# Allegro board C074P02-IPCAM-M1-A02.brd
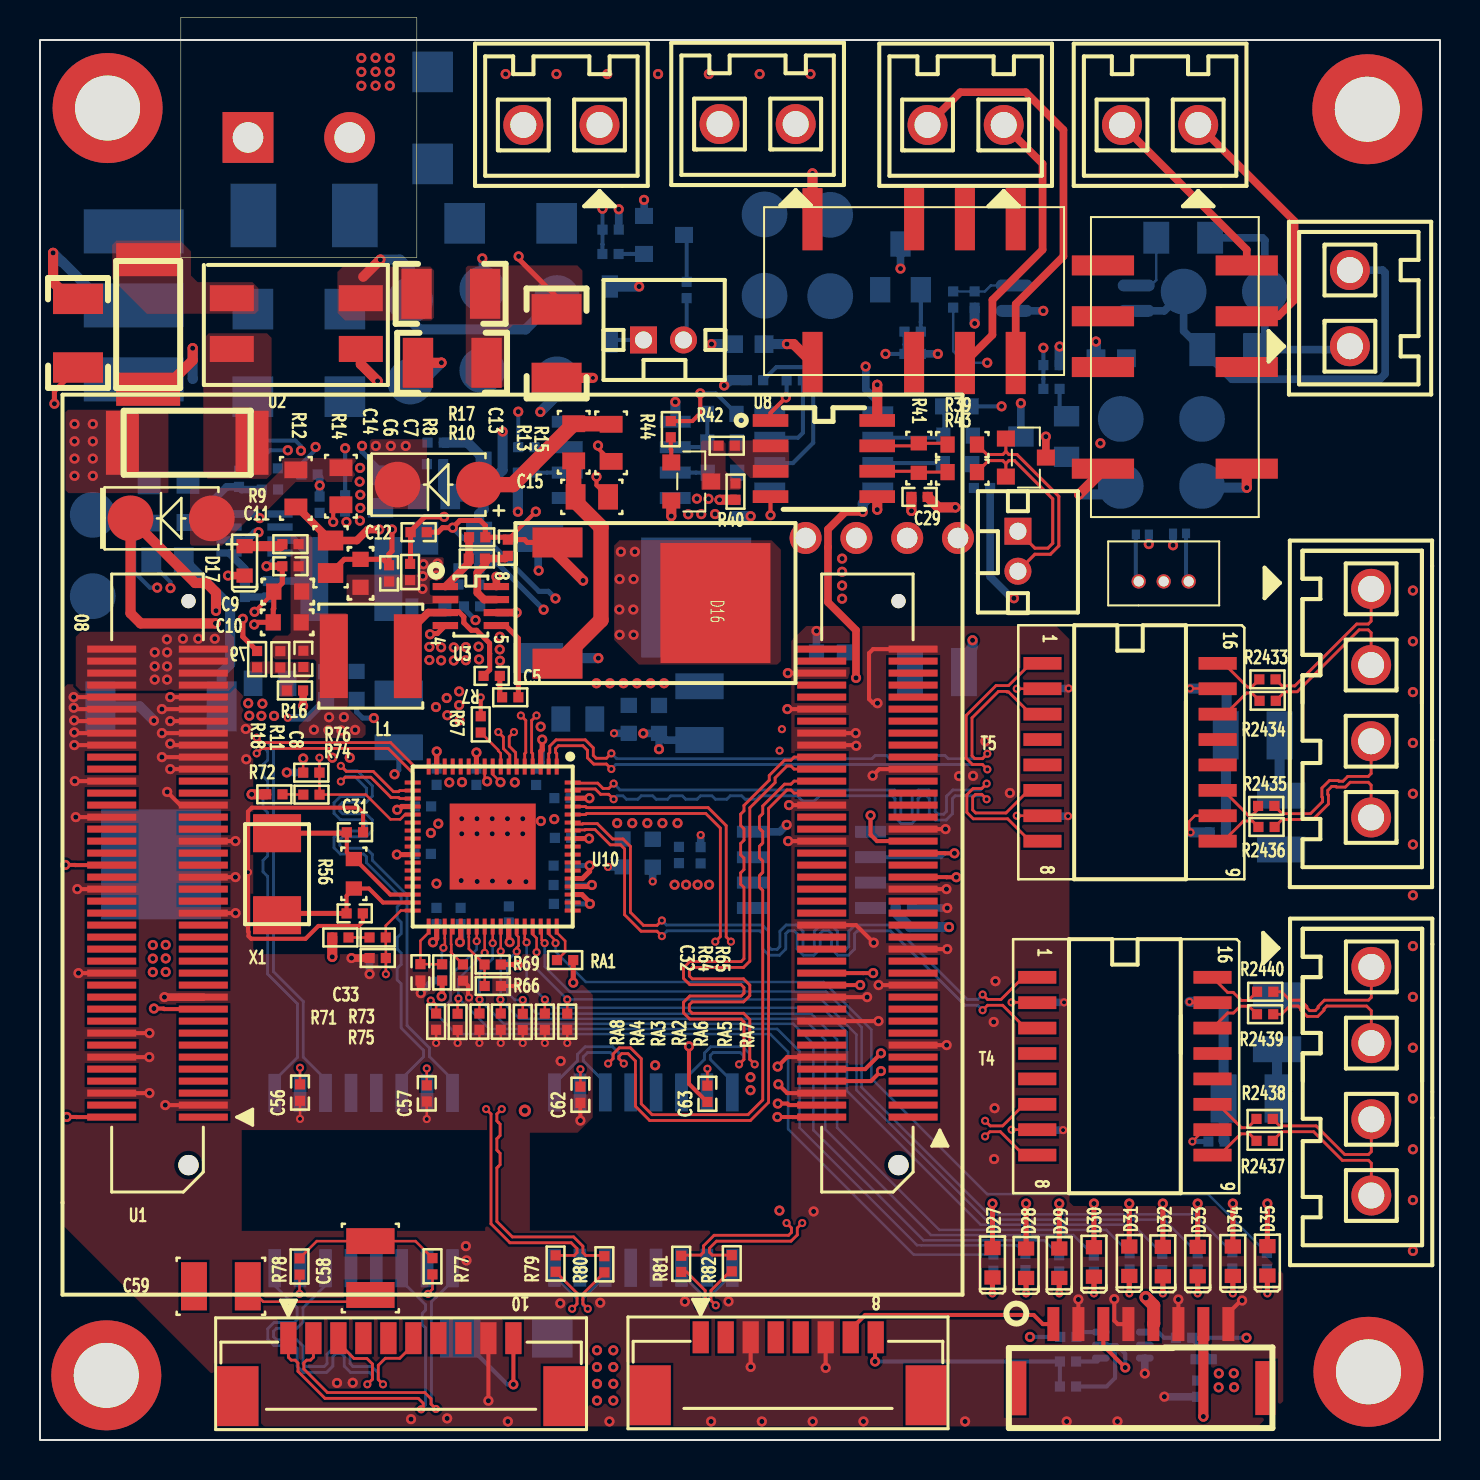
[diagram p0: board, top side]
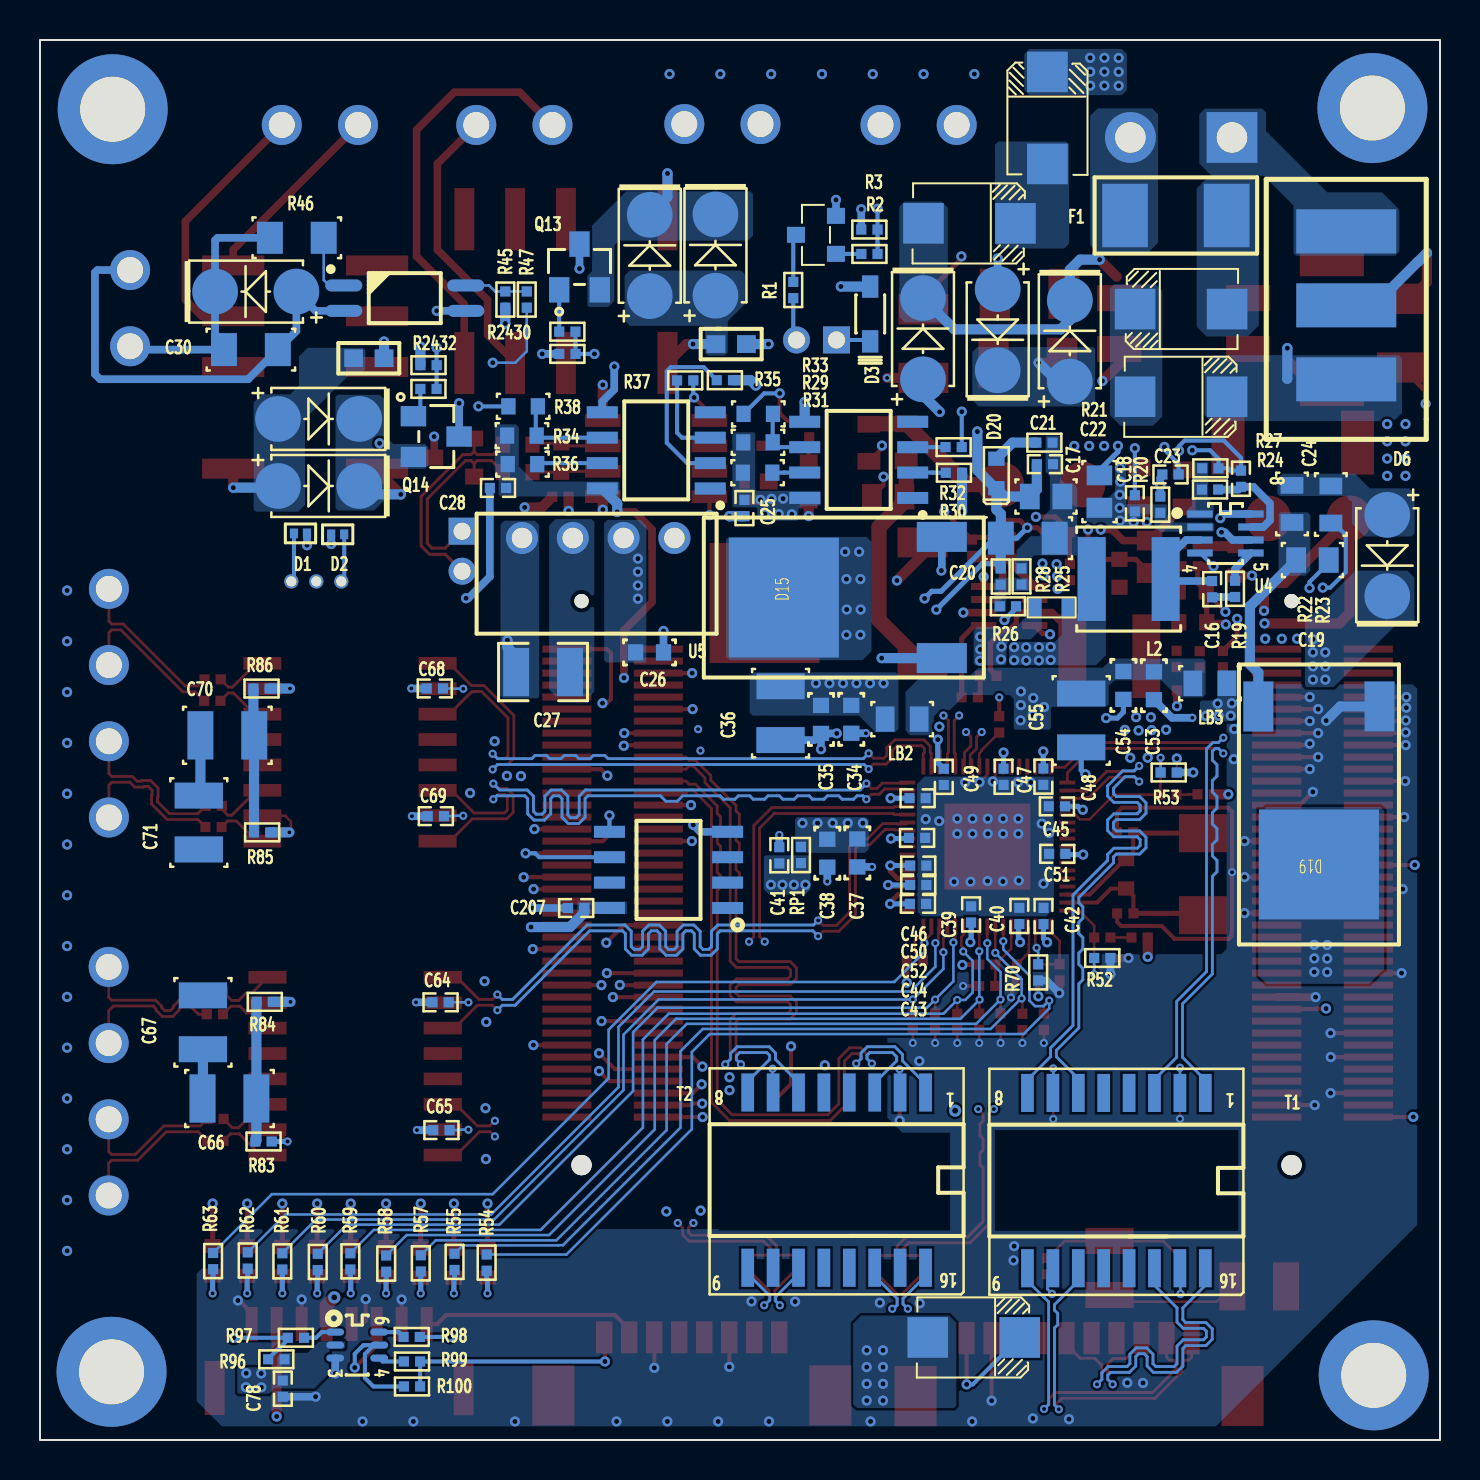
[diagram p1: board, bottom side, seen from below]

Outline 70 x 70 mm; copper layers: TOP, G1, S1, P1, G2, BOTTOM. Coordinates in mm from the lower left corner of the outline.
Outline path: rectangle 0,0 70,70

## Design rules (mm)
net group 16D_AL_OUT: nets 16D_AL_OUT AC_OUTL
net group 485_A: nets 485_A N17404012
net group 485_B: nets 485_B N17404016
net group AU_C: nets AU_C LSADC_CH1
net group PRX+1: nets PRX1P PRX+1
net group PRX+2: nets PRX2P PRX+2
net group PRX-1: nets PRX1N PRX-1
net group PRX-2: nets PRX2N PRX-2
net group PTX+1: nets PTX1P PTX+1
net group PTX+2: nets PTX2P PTX+2
net group PTX-1: nets PTX1N PTX-1
net group PTX-2: nets PTX2N PTX-2
net group PTX-6: nets PTX-6 SD6
net group PTX-7: nets PTX-7 SD7
net group RX3N: nets RX3N RXIM3
net group RX3P: nets RX3P RXIP3
net group TX3N: nets TX3N TXOM3
net group TX3P: nets TX3P TXOP3
net group CRTX1: nets RXIM1 RXIP1 TXOM1 TXOP1
net group CRTX2: nets RXIM2 RXIP2 TXOM2 TXOP2
net group CRTX3: nets MDI0+ MDI0- MDI1+ MDI1-
net group CRTX5: nets RXIM5 RXIP5 TXOM5 TXOP5
net group N17440667: nets N17440661
net group N17440679: nets N17440691
net group N17440699: nets N17440673 N17440699 N17440701
net group RTX5: nets PRX+5 PRX-5 PTX+5 PTX-5

## Placement (name value [footprint] x y rotation side)
C1  1NF/2KV  [1210]  18.83 57.31 0 top
C2  1NF/2KV  [1210]  1.9 57.06 270 top
C3  1NF/2KV  [1210]  18.9 53.86 0 top
C4  1NF/2KV  [1210]  25.83 56.53 270 top
C5  100NF  [SC0402]  22.58 38.2 180 top
C6  22uf_16V  [SC0603]  16.03 43.33 90 top
C7  100NF  [SC0402]  17.45 43.33 90 top
C8  15PF  [SC0402]  13.17 39.06 270 top
C9  22uf_16V  [SC0603]  12.39 42.42 180 top
C10  22uf_16V  [SC0603]  12.36 40.88 180 top
C11  100NF  [SC0402]  12.52 43.69 180 top
C12  100NF/NC  [SC0402]  18.93 45.39 0 top
C13  100NF  [SC0402]  23.39 44.61 90 top
C14  100NF  [SC0805]  14.53 44.16 270 top
C15  100NF  [SC0805]  27.59 47.16 0 top
C16  100NF  [SC0402]  11.39 42.54 90 bottom
C17  22UF  [SC0805]  17.03 47.42 90 bottom
C18  100NF  [SC0402]  15.26 46.83 90 bottom
C19  100NF  [SC0805]  6.38 44 180 bottom
C20  47UF  [SC1206]  20.61 45.09 0 bottom
C21  22UF  [SC0805]  19.7 47.17 0 bottom
C22  100NF  [SC0402]  19.75 48.79 0 bottom
C23  100NF/NC  [SC0402]  13.47 48.28 180 bottom
C24  100NF  [SC0402]  9.95 48.06 90 bottom
C25  100nF  [SC0402]  34.78 46.6 270 bottom
C26  100NF  [SC0603]  39.52 39.38 180 bottom
C27  22UF/50V  [SC1210B]  44.85 38.4 180 bottom
C28  100nF  [SC0402]  47.1 47.6 0 bottom
C29  100NF  [SC0402]  43.98 47.16 180 top
C30  1NF/2KV  [SC1206]  59.46 54.52 180 bottom
C31  30PF  [SC0402]  15.75 30.39 180 top
C32  100NF  [SC0402]  19.02 23.38 90 top
C33  30PF  [SC0402]  15.73 26.33 180 top
C34  100NF  [SC0603]  29.44 36.03 270 bottom
C35  22uF  [SC0603]  30.95 36.03 270 bottom
C36  47UF  [SC1210]  32.97 36.34 270 bottom
C37  100NF  [SC0603]  29.13 29.35 270 bottom
C38  10UF/NC  [SC0603]  30.64 29.34 270 bottom
C39  100NF  [SC0402]  23.45 26.28 90 bottom
C40  100NF  [SC0402]  21.03 26.2 90 bottom
C41  100NF  [SC0402]  33.03 29.24 90 bottom
C42  100NF  [SC0402]  19.83 26.2 90 bottom
C43  100NF  [SC0402]  26.1 26.81 180 bottom
C44  100NF  [SC0402]  26.09 27.75 180 bottom
C45  100NF  [SC0402]  19.15 31.68 0 bottom
C46  100NF  [SC0402]  26.12 32.09 180 bottom
C47  100NF  [SC0402]  21.82 33.16 270 bottom
C48  100NF  [SC0402]  19.83 33.17 270 bottom
C49  100NF  [SC0402]  24.81 33.16 270 bottom
C50  100NF  [SC0402]  26.15 30.1 180 bottom
C51  100NF  [SC0402]  19.14 29.31 0 bottom
C52  100NF  [SC0402]  26.09 28.72 180 bottom
C53  100NF  [SC0603]  14.3 37.72 270 bottom
C54  22uF  [SC0603]  15.83 37.73 270 bottom
C55  47UF  [SC1210]  17.94 35.98 270 bottom
C56  100nF  [SC0402]  13 17.37 90 top
C57  100nF  [SC0402]  19.34 17.33 90 top
C58  1NF/2KV  [SC1210]  16.52 8.6 90 top
C59  1NF/2KV  [SC1210]  9.04 7.68 0 top
C62  100nF  [SC0402]  27.02 17.26 90 top
C63  100nF  [SC0402]  33.37 17.31 90 top
C64  100nF  [SC0402]  49.97 21.88 180 bottom
C65  100nF  [SC0402]  49.93 15.49 180 bottom
C66  1NF/2KV  [SC1210]  60.53 17.07 180 bottom
C67  1NF/2KV  [SC1210]  61.85 20.88 270 bottom
C68  100nF  [SC0402]  50.26 37.58 180 bottom
C69  100nF  [SC0402]  50.21 31.19 180 bottom
C70  1NF/2KV  [SC1210]  60.63 35.23 180 bottom
C71  1NF/2KV  [SC1210]  62.06 30.87 90 bottom
C78  10NF/25V  [SC0402]  57.86 2.57 90 bottom
C207  100NF  [SC0402]  43.19 26.6 180 bottom
D1  PESD5V0S1BL315  [HSOD882]  56.98 45.33 180 bottom
D2  PESD5V0S1BL315  [HSOD882]  55.12 45.28 0 bottom
D3  BAT60BE6327  [HSOD323A]  28.49 56.3 270 bottom
D4  SS36-A  [SMB]  12.94 56.55 0 bottom
D5  SS36-A  [SMB]  12.94 52.16 180 bottom
D6  -  [B3D090L]  4.69 53.03 90 bottom
D7  SMAJ5_0CA  [SMA]  18.51 54.95 90 bottom
D9  SMAJ5_0CA  [SMA]  25.85 55.06 90 bottom
D10  SMAJ5_0CA  [SMA]  22.11 55.52 270 bottom
D13  BZT52C5V1  [SMA]  6.56 46.08 180 top
D14  BZT52C5V1  [SMA]  19.91 47.77 180 top
D15  BT151S-500R  [D-PACK7_7]  32.81 42.12 90 bottom
D16  BT151S-500R  [D-PACK7_7]  33.77 41.85 270 top
D17  Led-G-0603  [LED0603]  10.23 43.96 90 top
D18  BZT52C3V3  [SMA]  2.64 44.22 270 bottom
D19  BT151S-500R  [D-PACK7_7]  6.05 28.78 0 bottom
D20  Led-G-0603  [LED0603]  22.18 48.33 90 bottom
D21  psot12c  [SOT23]  49.29 49.12 270 top
D22  SMAJ36CA  [SMA]  59.21 57.42 0 bottom
D27  LED  [LED0603]  47.62 8.86 90 top
D28  LED  [LED0603]  49.3 8.84 90 top
D29  LED  [LED0603]  50.96 8.84 90 top
D30  LED  [LED0603]  52.7 8.9 90 top
D31  LED  [LED0603]  54.46 8.94 90 top
D32  LED  [LED0603]  56.14 8.92 90 top
D33  LED  [LED0603]  57.88 8.92 90 top
D34  LED  [LED0603]  59.64 8.94 90 top
D35  LED  [LED0603]  61.37 8.96 90 top
D36  SS36  [SMB]  23.31 5.13 180 bottom
D50  S1G  [SMA]  39.51 59.23 90 bottom
D51  S1G  [SMA]  56.07 47.7 180 bottom
D70  S1G  [SMA]  36.23 59.25 90 bottom
D71  S1G  [SMA]  56.07 51.05 180 bottom
D72  SS36-A  [SMB]  23.53 60.83 180 bottom
D73  SS36-A  [SMB]  19.63 66.1 90 bottom
F1  PTC FC-1.5A  [SF6127]  13.21 61.23 180 bottom
J1  ZH-3P  [CON1X3PD1_25]  54.93 42.93 0 top
J2  PH-2P  [CON1X2PD2]  30.18 55 0 top
J3  KF127-2P  [CON1X2PD3_811]  35.88 65.8 180 top
J4  POW_IN  [CON-1X2P-508-KF127S]  12.94 65.13 0 top
J5  KF127-2P  [CON1X2PD3_811]  26.07 65.75 180 top
J6  PH-2P  [CON1X2PD2]  48.9 45.44 270 top
J7  IO_OUT3  [CON1X2PD3_811]  65.49 56.59 90 top
J8  IO_OUT3  [CON1X2PD3_811]  46.28 65.75 180 top
J9  IO_OUT3  [CON1X2PD3_811]  56 65.75 180 top
J10  Audio  [A1251WV-S-8P]  38.03 5.14 180 top
J11  SIP-10  [A1251WV-S-10P]  17.42 5.09 180 top
J12  CON4  [CON1X4PD3_81-180]  66.57 21.75 270 top
J13  CON4  [CON1X4PD3_81-180]  66.56 40.65 270 top
J18  HEADER 8  [GH1_25_8P]  55.04 2.6 0 top
L1  4.7UH  [SPL0505L]  16.54 39.19 180 top
L2  4.7UH  [SPL0505L]  15.57 43.05 0 bottom
LB1  120R-100MHz  [L0603]  19.42 41.63 0 bottom
LB2  MGLB2012_220T_LF  [SL0805]  26.89 36.04 0 bottom
LB3  MGLB2012_220T_LF  [SL0805]  11.5 37.83 0 bottom
LB187  BLM18PG121SN1D  [SL0603]  35.44 54.8 180 bottom
LB188  BLM18PG121SN1D  [SL0603]  53.56 54.09 180 bottom
M1  NC  [HOLE6C3_5MM]  3.38 66.6 0 top
M2  NC  [HOLE6C3_5MM]  66.37 66.54 0 top
M3  NC  [HOLE6C3_5MM]  66.42 3.41 0 top
M4  NC  [HOLE6C3_5MM]  3.31 3.23 0 top
Q1  BC847ALT1/NPN  [SOT23]  31.2 60.26 90 bottom
Q2  BC847ALT1/NPN  [SOT23]  32.56 47.93 270 top
Q13  8550  [SOT23-Z]  43.03 58.65 180 bottom
Q14  8550  [SOT23-Z]  50.19 50.17 270 bottom
R1  499R  [SR0402]  32.34 57.5 270 bottom
R2  1K 1%  [SR0402]  28.53 59.3 180 bottom
R3  10K  [SR0402]  28.53 60.52 180 bottom
R4  0R  [SR2512]  5.41 55.77 90 top
R6  0R  [SR2512]  7.36 49.86 0 top
R7  10R  [SR0402]  23.51 37.14 180 top
R8  100K  [SR0402]  18.51 43.4 90 top
R9  2K  [SR0402]  12.52 44.79 180 top
R10  100K  [SR0402]  21.84 44.07 180 top
R11  40.2K  [SR0402]  12.02 39.03 270 top
R12  100R  [SR0805]  12.79 47.58 270 top
R13  100R  [SR0805]  26.69 49.89 270 top
R14  39R  [SR0805]  15.05 47.69 90 top
R15  39R  [SR0805]  28.56 49.86 90 top
R16  33.2K  [SR0402]  12.75 37.48 180 top
R17  12.7K  [SR0402]  21.86 45.14 0 top
R18  7.68K  [SR0402]  10.85 39.04 90 top
R19  10R  [SR0402]  10.25 42.56 270 bottom
R20  100K  [SR0402]  13.98 46.77 90 bottom
R21  1K  [SR0402]  19.78 49.87 0 bottom
R22  100R  [SR0805]  7.4 46.8 270 bottom
R23  100R  [SR0805]  5.46 46.77 90 bottom
R24  100K  [SR0402]  11.5 47.52 0 bottom
R25  40.2K  [SR0402]  20.92 43.18 270 bottom
R26  33K  [SR0402]  21.6 41.68 0 bottom
R27  10K  [SR0402]  11.48 48.58 180 bottom
R28  13K  [SR0402]  21.96 43.17 90 bottom
R29  10K  [SR0603]  34.1 49.88 180 bottom
R30  510R  [SR0402]  24.3 48.36 0 bottom
R31  10K  [SR0603]  34.12 48.37 180 bottom
R32  0R  [SR0402]  24.32 49.64 0 bottom
R33  0R  [SR0603]  34.09 51.31 0 bottom
R34  10K  [SR0603]  45.9 50.22 180 bottom
R35  510R  [SR0402]  35.76 52.99 0 bottom
R36  10K  [SR0603]  45.88 48.79 180 bottom
R37  0R  [SR0402]  37.74 52.98 0 bottom
R38  0R  [SR0603]  45.84 51.68 0 bottom
R39  10R  [SR0603]  46.11 49.77 0 top
R40  10K  [SR0402]  34.77 47.42 270 top
R41  120R/NC  [SR0603]  43.94 49.1 90 top
R42  0R  [SR0402]  34.34 49.71 0 top
R43  10R  [SR0603]  46.11 48.39 0 top
R44  1K 1%  [SR0402]  31.54 50.54 270 top
R45  10K 1%  [SR0402]  46.73 57.02 90 bottom
R46  1K/1206  [SR1206]  57.16 60.11 180 bottom
R47  0K 1%  [SR0402]  45.66 57.02 270 bottom
R52  0R/NC  [SR0402]  16.89 24.1 180 bottom
R53  0R/NC  [SR0402]  13.57 33.38 180 bottom
R54  75R  [SR0402]  47.67 8.87 270 bottom
R55  75R  [SR0402]  49.27 8.91 270 bottom
R56  1M  [SR0603]  15.69 28.31 270 top
R57  75R  [SR0402]  50.96 8.83 270 bottom
R58  75R  [SR0402]  52.69 8.82 270 bottom
R59  75R  [SR0402]  54.48 8.93 270 bottom
R60  75R  [SR0402]  56.11 8.9 270 bottom
R61  75R  [SR0402]  57.88 8.93 270 bottom
R62  75R  [SR0402]  59.61 8.98 270 bottom
R63  75R  [SR0402]  61.34 8.95 270 bottom
R64  470K  [SR0402]  20.11 23.38 90 top
R65  0R  [SR0402]  21.15 23.37 90 top
R66  NC/4.7K  [SR0402]  22.64 22.7 0 top
R67  6.2K  [SR0402]  22.04 35.78 90 top
R69  4.7K/NC  [SR0402]  22.63 23.77 0 top
R70  4.7K/NC  [SR0402]  20.09 23.38 270 bottom
R71  1K  [SR0402]  15.02 25.12 0 top
R72  1K  [SR0402]  11.72 32.28 0 top
R73  100R  [SR0402]  16.88 25.12 0 top
R74  100R  [SR0402]  13.57 32.27 0 top
R75  910R  [SR0402]  16.89 24.1 180 top
R76  910R  [SR0402]  13.57 33.37 180 top
R77  75R  [SR0402]  19.62 8.69 90 top
R78  75R  [SR0402]  12.98 8.68 90 top
R79  0R  [SR0402]  25.78 8.82 270 top
R80  0R  [SR0402]  28.22 8.78 270 top
R81  0R  [SR0402]  32.06 8.81 270 top
R82  0R  [SR0402]  34.59 8.84 270 top
R83  75R  [SR0402]  58.82 14.92 0 bottom
R84  75R  [SR0402]  58.76 21.91 0 bottom
R85  75R  [SR0402]  58.89 30.38 0 bottom
R86  75R  [SR0402]  58.92 37.57 0 bottom
R96  1K  [SR0402]  58.18 4.04 180 bottom
R97  0R  [SR0402]  57.2 5.11 0 bottom
R98  0R  [SR0402]  51.41 5.15 0 bottom
R99  0R  [SR0402]  51.4 3.93 0 bottom
R100  0R/NC  [SR0402]  51.4 2.68 0 bottom
R2429  1K  [R0402]  43.63 55.42 0 bottom
R2430  1K  [SR0402]  43.63 54.3 180 bottom
R2431  1K  [R0402]  50.58 52.55 0 bottom
R2432  1K  [SR0402]  50.57 53.74 180 bottom
R2433  2.2R  [SR0402]  61.37 38.03 0 top
R2434  2.2R  [SR0402]  61.38 36.96 0 top
R2435  2.2R  [SR0402]  61.31 31.71 0 top
R2436  2.2R  [SR0402]  61.33 30.65 0 top
R2437  2.2R  [SR0402]  61.23 14.96 0 top
R2438  2.2R  [SR0402]  61.23 16.05 0 top
R2439  2.2R  [SR0402]  61.25 21.29 0 top
R2440  2.2R  [SR0402]  61.26 22.41 0 top
RA1  NC(4.7K)  [SR0402]  26.26 24 0 top
RA2  NC(4.7K)  [SR0402]  23.04 20.92 270 top
RA3  NC(4.7K)  [SR0402]  21.97 20.92 270 top
RA4  NC(4.7K)  [SR0402]  20.88 20.9 270 top
RA5  NC(4.7K)  [SR0402]  25.24 20.92 270 top
RA6  NC(4.7K)  [SR0402]  24.14 20.9 270 top
RA7  NC(4.7K)  [SR0402]  26.36 20.92 270 top
RA8  NC(4.7K)  [SR0402]  19.81 20.92 270 top
RLY3  HFD3/3-S  [HFD3_3-S]  43.7 57.44 0 top
RLY4  HFD3/3-S  [HFD3_3-S]  56.74 53.65 90 top
RP1  0R  [SR0402]  31.95 29.25 90 bottom
T1  H1102L  [STFM16-50-285]  16.18 12.97 0 bottom
T2  H1102L-ai  [STFM16-50-285]  30.17 12.99 0 bottom
T4  H1102L  [STFM16-50-285]  54.25 18.69 270 top
T5  H1102L  [STFM16-50-285]  54.5 34.39 270 top
U1  3516DV300-MD  [16DV300_CORE1]  1.12 7.27 0 top
U2  SF0905100YL  [SF0905250YL-1]  9.59 54.55 0 top
U3  MP1495S  [TSOT23-8]  21.54 41.7 270 top
U4  MP1495S  [TSOT23-8]  10.73 45.33 270 bottom
U5  -  [B0505S-W2R2]  38.28 45.1 0 bottom
U6  HCPL0600  [SOP8]  29.07 49.01 0 bottom
U7  HCPL0600  [SOP8]  39.19 49.48 0 bottom
U8  MAX485ESA  [SOP8-50-150]  39.19 49.07 270 top
U9  TLP281-GB  [SOP4]  51.76 57.09 180 bottom
U10  IP178G  [QFN68-178]  22.64 29.67 270 top
U14  SG3001  [SC70-6]  54.14 4.75 270 bottom
U28  AT88SC0104  [SO8]  38.32 28.5 0 bottom
X1  NX5032GB-25.000M-STD-CSK-5  [5032]  11.85 28.29 0 top

## Library data of the parts
C1-C4 = C_3: room: 2
C5-C13 = C_0: room: 2
C14 C15 C19 = C_4: room: 2
C16 C18 C22-C24 = C: signal model: DEFAULT_CAPACITOR_100000pF_1_2; room: 2
C17 C21 = C: signal model: DEFAULT_CAPACITOR_2.2e+07pF_1_2; room: 2
C20 = C: signal model: DEFAULT_CAPACITOR_4.7e+07pF_1_2; room: 2
C25 C28 C30 = CAP_NP: room: 3
C26 C27 = C_0: room: 3
C29 = C: room: 3
C31-C55 = C-0603: room: 4
C56-C59 = CAP_NP: room: 4
C62-C71 = CAP_NP: room: 5
C78 = CAP_NP: room: 6
C207 = C_3: room: 1
D1 D2 = DZ_L: room: 1
D3 = D_A_0: room: 1
D4 D5 D72 D73 = D_A_0: room: 2
D6 = CON3: room: 2
D7 D9 D10 = DZ3_0: room: 2
D13 D14 D18 = BZX84C10/SOT_0: room: 2
D15 D16 D19 = BZX84C10/SOT_2
D17 D20 = LED_1: room: 2
D21 = D-TVS_0: room: 3
D22 = BZX84C10/SOT_0: room: 3
D27-D34 = LL4148_1: room: 4
D35 = LL4148_2: room: 4
D36 = BZX84C10/SOT_0: room: 4
D50 D51 D70 D71 = DIODE_3: room: 3
F1 = FS-A: room: 2
J1 = HEADER 3: room: 1
J2 = CON2: room: 1
J3-J5 = CON2: room: 2
J6-J9 = CON2: room: 3
J10 = 8 HEADER: room: 4
J11 = SIP-10: room: 4
J12 J13 = CON4: room: 5
J18 = HEADER 8: room: 6
L1 L2 = L: signal model: DEFAULT_INDUCTOR_4.7e-06nH_1_2; room: 2
LB1 = BEAD: room: 2
LB2 LB3 = LB: room: 4
LB187 LB188 = LB: room: 3
M1-M4 = ID-BOARD_1: room: 1
Q1 = NPN-BEC_2: room: 1
Q2 = BPW37/TO_0: room: 3
Q13 Q14 = PNP BEC: room: 3
R1-R3 = Resistor: room: 1
R4 R6 = R: room: 2
R7 R8 R10 R11 R16-R18 = R_2: room: 2
R9 R12-R15 R21-R23 = R-0603: room: 2
R19 = R: signal model: DEFAULT_RESISTOR_10.000000OHM_1_2; room: 2
R20 R24 = R: signal model: DEFAULT_RESISTOR_100000OHM_1_2; room: 2
R25 = R: signal model: DEFAULT_RESISTOR_121000OHM_1_2; room: 2
R26 = R: signal model: DEFAULT_RESISTOR_33000OHM_1_2; room: 2
R27 = R: signal model: DEFAULT_RESISTOR_11300OHM_1_2; room: 2
R28 = R: signal model: DEFAULT_RESISTOR_39200OHM_1_2; room: 2
R29-R38 R41 R42 R45-R47 = Resistor: room: 3
R39 R43 = R: signal model: R_SR0603_10R_10R; room: 3
R40 R44 = Resistor_0: room: 3
R52 R53 = Resistor_0: room: 4
R54 R55 R57-R67 R69 R70 RP1 = R_4: room: 4
R56 = R-0603: room: 4
R71-R76 = R: signal model: DEFAULT_RESISTOR_220.000000OHM_1_2; room: 4
R77 R78 = Resistor: room: 4
R79-R82 = R: signal model: DEFAULT_RESISTOR_220.000000OHM_1_2; room: 5
R83-R86 = Resistor: room: 5
R96-R98 = R: signal model: DEFAULT_RESISTOR_33000OHM_1_2; room: 6
R99 R100 = R_0: room: 6
R2429 R2431 = R_Generic: room: 3
R2430 R2432 = R: signal model: DEFAULT_RESISTOR_33000OHM_1_2; room: 3
R2433-R2440 = Resistor: signal model: RESISTOR_SR0402_2.2R_2.2R; room: 5
RA1-RA8 = R_3: room: 4
RLY3 RLY4 = RELAY DPDT_5: room: 3
T1 = 000-7090-37R_1: room: 4
T2 T4 T5 = 000-7090-37R_1: room: 5
U1 = 3516DV300-MD_0: room: 1
U2 = CON4A_0: room: 2
U3 = MP1494S_5: room: 2
U4 = MP1494S_0: room: 2
U5 = IB1212S-W75R3: room: 3
U6 U7 = 6N137: room: 3
U8 = MAX3485E_0: room: 3
U9 = TLP621: room: 3
U10 = IP178GA_11: Tolerance: RichardLC; room: 4
U14 = SG3001: room: 6
U28 = AT88SC0104: room: 1
X1 = Crystal4_1: room: 4

## Footprints (pads in the part's own frame, mm; a bottom-side part is the same pattern mirrored in y, then rotated)
16DV300_CORE1
  round 0.711 hole 0.711 unplated: (6.3,34.68) (41.8,34.68)
  round 1.016 hole 1.016 unplated: (6.3,6.48) (41.8,6.48)
  rect 2.451x0.35 smd: 1(7.04,8.88) 2(2.46,8.88) 3(7.04,9.48) 4(2.46,9.48) 5(7.04,10.08) 6(2.46,10.08) 7(7.04,10.68) 8(2.46,10.68) 9(7.04,11.28) 10(2.46,11.28) 11(7.04,11.88) 12(2.46,11.88) 13(7.04,12.48) 14(2.46,12.48) 15(7.04,13.08) 16(2.46,13.08) 17(7.04,13.68) 18(2.46,13.68) 19(7.04,14.28) 20(2.46,14.28) 21(7.04,14.88) 22(2.46,14.88) 23(7.04,15.48) 24(2.46,15.48) 25(7.04,16.08) 26(2.46,16.08) 27(7.04,16.68) 28(2.46,16.68) 29(7.04,17.28) 30(2.46,17.28) 31(7.04,17.88) 32(2.46,17.88) 33(7.04,18.48) 34(2.46,18.48) 35(7.04,19.08) 36(2.46,19.08) 37(7.04,19.68) 38(2.46,19.68) 39(7.04,20.28) 40(2.46,20.28) 41(7.04,20.88) 42(2.46,20.88) 43(7.04,21.48) 44(2.46,21.48) 45(7.04,22.08) 46(2.46,22.08) 47(7.04,22.68) 48(2.46,22.68) 49(7.04,23.28) 50(2.46,23.28) 51(7.04,23.88) 52(2.46,23.88) 53(7.04,24.48) 54(2.46,24.48) 55(7.04,25.08) 56(2.46,25.08) 57(7.04,25.68) 58(2.46,25.68) 59(7.04,26.28) 60(2.46,26.28) 61(7.04,26.88) 62(2.46,26.88) 63(7.04,27.48) 64(2.46,27.48) 65(7.04,28.08) 66(2.46,28.08) 67(7.04,28.68) 68(2.46,28.68) 69(7.04,29.28) 70(2.46,29.28) 71(7.04,29.88) 72(2.46,29.88) 73(7.04,30.48) 74(2.46,30.48) 75(7.04,31.08) 76(2.46,31.08) 77(7.04,31.68) 78(2.46,31.68) 79(7.04,32.28) 80(2.46,32.28) 81(42.53,8.88) 82(37.96,8.88) 83(42.53,9.48) 84(37.96,9.48) 85(42.53,10.08) 86(37.96,10.08) 87(42.53,10.68) 88(37.96,10.68) 89(42.53,11.28) 90(37.96,11.28) 91(42.53,11.88) 92(37.96,11.88) 93(42.53,12.48) 94(37.96,12.48) 95(42.53,13.08) 96(37.96,13.08) 97(42.53,13.68) 98(37.96,13.68) 99(42.53,14.28) 100(37.96,14.28) 101(42.53,14.88) 102(37.96,14.88) 103(42.53,15.48) 104(37.96,15.48) 105(42.53,16.08) 106(37.96,16.08) 107(42.53,16.68) 108(37.96,16.68) 109(42.53,17.28) 110(37.96,17.28) 111(42.53,17.88) 112(37.96,17.88) 113(42.53,18.48) 114(37.96,18.48) 115(42.53,19.08) 116(37.96,19.08) 117(42.53,19.68) 118(37.96,19.68) 119(42.53,20.28) 120(37.96,20.28) 121(42.53,20.88) 122(37.96,20.88) 123(42.53,21.48) 124(37.96,21.48) 125(42.53,22.08) 126(37.96,22.08) 127(42.53,22.68) 128(37.96,22.68) 129(42.53,23.28) 130(37.96,23.28) 131(42.53,23.88) 132(37.96,23.88) 133(42.53,24.48) 134(37.96,24.48) 135(42.53,25.08) 136(37.96,25.08) 137(42.53,25.68) 138(37.96,25.68) 139(42.53,26.28) 140(37.96,26.28) 141(42.53,26.88) 142(37.96,26.88) 143(42.53,27.48) 144(37.96,27.48) 145(42.53,28.08) 146(37.96,28.08) 147(42.53,28.68) 148(37.96,28.68) 149(42.53,29.28) 150(37.96,29.28) 151(42.53,29.88) 152(37.96,29.88) 153(42.53,30.48) 154(37.96,30.48) 155(42.53,31.08) 156(37.96,31.08) 157(42.53,31.68) 158(37.96,31.68) 159(42.53,32.28) 160(37.96,32.28)
1210
  rect 1.519x2.499 smd: 1(0,0) 2(3.43,0)
5032
  rect 2.4x1.9 smd: 1(0,2.05) 2(0,-2.05)
A1251WV-S-8P
  rect 2.108x2.997 smd: (-6.3,2.9) (7.55,2.9)
  rect 0.813x1.6 smd: 1(5,0) 2(3.75,0) 3(2.5,0) 4(1.25,0) 5(0,0) 6(-1.25,0) 7(-2.5,0) 8(-3.75,0)
A1251WV-S-10P
  rect 2.108x2.997 smd: (-8.8,2.9) (7.55,2.9)
  rect 0.813x1.6 smd: 1(5,0) 2(3.75,0) 3(2.5,0) 4(1.25,0) 5(0,0) 6(-1.25,0) 7(-2.5,0) 8(-3.75,0) 9(-5,0) 10(-6.25,0)
B3D090L
  rect 2.2x4.999 smd: 1(0,0) 2(3.7,0) 3(7.4,0)
B0505S-W2R2
  round 1.6 hole 1.026: 1(0,0) 2(2.54,0) 3(5.08,0) 4(7.62,0)
CON1X2PD2
  rect 1.349x1.349 hole 0.851: 1(0,0)
  round 1.351 hole 0.851: 2(2,0)
CON1X2PD3_811
  round 1.999 hole 1.301: 1(-1.905,0) 2(1.905,0)
CON1X3PD1_25
  round 0.711 hole 0.508: 1(0,0) 2(1.25,0) 3(2.5,0)
CON1X4PD3_81-180
  round 1.999 hole 1.301: 1(-1.905,0) 2(1.905,0) 3(5.715,0) 4(9.525,0)
CON-1X2P-508-KF127S
  rect 2.54x2.54 hole 1.524: 1(-2.54,0)
  round 2.54 hole 1.524: 2(2.54,0)
D-PACK7_7
  rect 1.5x2.5 smd: 1(-3.03,-7.9) 3(3.03,-7.9)
  rect 6x5.5 smd: 2(0,0)
GH1_25_8P
  rect 1.001x2.7 smd: (-6.225,-0.01) (6.225,0)
  rect 0.599x1.699 smd: 1(-4.375,3.2) 2(-3.125,3.2) 3(-1.875,3.2) 4(-0.625,3.2) 5(0.625,3.2) 6(1.875,3.2) 7(3.125,3.2) 8(4.375,3.2)
HFD3_3-S
  rect 1x3.11 smd: 1(-5.08,-3.595) 3(0,-3.595) 4(2.54,-3.595) 5(5.08,-3.595) 8(5.08,3.595) 9(2.54,3.595) 10(0,3.595) 12(-5.08,3.595)
HOLE6C3_5MM
  round 5.5 hole 3.25: 1(0,0)
HSOD323A
  rect 1.118x0.813 smd: 1(1.372,0) 2(-1.372,0)
HSOD882
  rect 0.406x0.483 smd: 1(-0.325,0) 2(0.325,0)
L0603
  rect 0.65x0.899 smd: 1(-0.825,0) 2(0.825,0)
LED0603
  rect 0.711x0.813 smd: A(0.737,0) C(-0.737,0)
QFN68-178
  rect 0.8x0.201 smd: 1(-4,3.2) 2(-4,2.799) 3(-4,2.4) 4(-4,1.999) 5(-4,1.6) 6(-4,1.199) 7(-4,0.8) 8(-4,0.401) 9(-4,0) 10(-4,-0.401) 11(-4,-0.8) 12(-4,-1.199) 13(-4,-1.6) 14(-4,-1.999) 15(-4,-2.4) 16(-4,-2.799) 17(-4,-3.2) 35(4,-3.2) 36(4,-2.799) 37(4,-2.4) 38(4,-1.999) 39(4,-1.6) 40(4,-1.199) 41(4,-0.8) 42(4,-0.401) 43(4,0) 44(4,0.401) 45(4,0.8) 46(4,1.199) 47(4,1.6) 48(4,1.999) 49(4,2.4) 50(4,2.799) 51(4,3.2)
  rect 0.201x0.8 smd: 18(-3.2,-4) 19(-2.799,-4) 20(-2.4,-4) 21(-1.999,-4) 22(-1.6,-4) 23(-1.199,-4) 24(-0.8,-4) 25(-0.401,-4) 26(0,-4) 27(0.401,-4) 28(0.8,-4) 29(1.199,-4) 30(1.6,-4) 31(1.999,-4) 32(2.4,-4) 33(2.799,-4) 34(3.2,-4) 52(3.2,4) 53(2.799,4) 54(2.4,4) 55(1.999,4) 56(1.6,4) 57(1.199,4) 58(0.8,4) 59(0.401,4) 60(0,4) 61(-0.401,4) 62(-0.8,4) 63(-1.199,4) 64(-1.6,4) 65(-1.999,4) 66(-2.4,4) 67(-2.799,4) 68(-3.2,4)
  rect 4.3x4.3 smd: 69(0,0)
R0402
  rect 0.508x0.508 smd: 1(-0.406,0) 2(0.406,0)
SC70-6
  oval 0.356x0.889 smd: 1(-0.65,-1.1) 2(0,-1.1) 3(0.65,-1.1) 4(0.65,1.1) 5(0,1.1) 6(-0.65,1.1)
SC0402
  rect 0.508x0.508 smd: 1(-0.406,0) 2(0.406,0)
SC0603
  rect 0.762x0.813 smd: 1(-0.699,0) 2(0.699,0)
SC0805
  rect 0.991x1.27 smd: 1(-0.813,0) 2(0.813,0)
SC1206
  rect 1.295x1.651 smd: 1(-1.346,0) 2(1.346,0)
SC1210
  rect 1.295x2.413 smd: 1(-1.346,0) 2(1.346,0)
SC1210B
  rect 1.295x2.413 smd: 1(-1.346,0) 2(1.346,0)
SF6127
  rect 2.286x3.175 smd: 1(-2.54,0) 2(2.54,0)
SF0905250YL-1
  rect 2.2x1.3 smd: 1(0,0) 2(0,2.54) 3(6.45,2.54) 4(6.45,0)
SL0603
  rect 0.94x0.889 smd: 1(-0.762,0) 2(0.762,0)
SL0805
  rect 0.94x1.27 smd: 1(-0.851,0) 2(0.851,0)
SMA
  round 2.286 smd: 1(-2.032,0) 2(2.032,0)
SMB
  rect 2.032x2.032 smd: 1(-2.3,0) 2(2.3,0)
SO8
  rect 1.549x0.599 smd: 1(-2.7,1.905) 2(-2.7,0.635) 3(-2.7,-0.635) 4(-2.7,-1.905) 5(3.208,-1.905) 6(3.208,-0.635) 7(3.208,0.635) 8(3.208,1.905)
SOP4
  oval 1.849x0.599 smd: 1(-3.05,0.635) 2(-3.05,-0.635) 3(3.05,-0.635) 4(3.05,0.635)
SOP8
  rect 1.549x0.599 smd: 1(-2.7,1.905) 2(-2.7,0.635) 3(-2.7,-0.635) 4(-2.7,-1.905) 5(2.7,-1.905) 6(2.7,-0.635) 7(2.7,0.635) 8(2.7,1.905)
SOP8-50-150
  rect 0.635x1.778 smd: 1(-1.905,-2.667) 2(-0.635,-2.667) 3(0.635,-2.667) 4(1.905,-2.667) 5(1.905,2.667) 6(0.635,2.667) 7(-0.635,2.667) 8(-1.905,2.667)
SOT23
  rect 0.8x0.899 smd: 1(-0.95,-1) 2(0.95,-1) 3(0,1)
SOT23-Z
  rect 1.016x1.27 smd: 1(-1.016,-1.143) 2(1.016,-1.143) 3(0,1.143)
SPL0505L
  rect 1.397x4.191 smd: 1(-1.85,0) 2(1.85,0)
SR0402
  rect 0.508x0.508 smd: 1(-0.406,0) 2(0.406,0)
SR0603
  rect 0.711x0.813 smd: 1(-0.737,0) 2(0.737,0)
SR0805
  rect 0.838x1.143 smd: 1(-0.927,0) 2(0.927,0)
SR1206
  rect 1.295x1.6 smd: 1(-1.346,0) 2(1.346,0)
SR2512
  rect 1.651x3.2 smd: 1(-3.24,0) 2(3.24,0)
STFM16-50-285
  rect 0.635x1.905 smd: 1(-4.445,-4.381) 2(-3.175,-4.381) 3(-1.905,-4.381) 4(-0.635,-4.381) 5(0.635,-4.381) 6(1.905,-4.381) 7(3.175,-4.381) 8(4.445,-4.381) 9(4.445,4.381) 10(3.175,4.381) 11(1.905,4.381) 12(0.635,4.381) 13(-0.635,4.381) 14(-1.905,4.381) 15(-3.175,4.381) 16(-4.445,4.381)
TSOT23-8
  rect 0.356x1.27 smd: 1(-0.975,-1.275) 2(-0.325,-1.275) 3(0.325,-1.275) 4(0.975,-1.275) 5(0.975,1.275) 6(0.325,1.275) 7(-0.325,1.275) 8(-0.975,1.275)

## Nets
3V3_BD: C28.1 C78.2 C207.2(B) D3.2(A) LB1.2 LB3.1 LB187.2 LB188.2 R30.1 R34.1 R36.1 R45.1 R71.1(A) R72.1(A) R96.2(B) R2430.1(A) R2432.1(A) U7.8(VCC) U14.2(V+) U28.8(VCC)
3V3_CORE: C20.1(A) C21.1(A) C22.1(A) D18.2(ANODE) L2.2(B) LB1.1 R21.1 R25.1(A) U1.73 U1.74 U1.75 U1.76 U1.77 U1.78 U1.79 U1.80
5V0_BD: C8.1(A) C9.1(A) C10.1(A) C11.1(A) C26.1(A) D13.2(ANODE) D14.2(ANODE) J18.5 L1.2(B) R9.1 R11.1(A) U5.2(VIN)
5V0_USB: U1.148
12V0: C6.1(A) C7.1(A) C17.1(A) C18.1(A) D15.2 D16.2 D19.2 D36.1(CATHODE) D73.2(K) J3.2 J5.2 J18.7 R8.1(A) R20.1(A) U3.2(IN) U4.2(IN)
12V_IPC: D36.2(ANODE) J11.10
AV10: C41.1 C42.1 C43.1 RP1.1 U10.36(DVDD#36) U10.54(DVDD#54)
AVCC: C47.1 C48.1 C49.1 C50.1 C51.1 C52.1 C53.1 C54.1 C55.1 LB2.1 LB3.2 RA1.2 U10.3(AV33#3) U10.11(PLLVCC) U10.16(AV33#16) U10.27(AV33#27) U10.56(PVDD_LDO) U10.61(AV33#61)
DVCC: C34.1 C35.1 C36.1 C39.1 C40.1 D27.A(ANODE) D28.A(ANODE) D29.A(ANODE) D30.A(ANODE) D31.A(ANODE) D32.A(ANODE) D33.A(ANODE) D34.A(ANODE) D35.A(ANODE) LB2.2 R64.1 R69.2 U10.39(PVDD#39) U10.45(PVDD#45)
DVDD3318_SDIO_VOUT: U1.157
GND: C4.2(B) C6.2(B) C7.2(B) C9.2(B) C10.2(B) C11.2(B) C12.2(B) C13.2(B) C14.2(B) C15.2(B) C17.2(B) C18.2(B) C19.2(B) C20.2(B) C21.2(B) C22.2(B) C23.2(B) C24.2(B) C26.2(B) C28.2 C31.1 C32.1 C33.1 C34.2 C35.2 C36.2 C37.2 C38.2 C39.2 C40.2 C41.2 C42.2 C43.2 C44.2 C45.2 C46.2 C47.2 C48.2 C49.2 C50.2 C51.2 C52.2 C53.2 C54.2 C55.2 C56.1 C57.1 C62.1 C63.1 C64.1 C65.1 C68.1 C69.1 C78.1 C207.1(A) D1.2 D2.2 D9.1(A) D10.1(A) D15.1 D16.1 D17.C D19.1 D20.C J1.2 J3.1 J5.1 J10.3 J10.6 J11.9 J18.2 J18.4 J18.6 J18.8 Q1.2(E) Q13.3(C) Q14.3(C) R3.1 R14.1 R15.1 R17.2(B) R18.2(B) R23.1 R27.2(B) R28.2(B) R52.2 R53.2 R65.1 R66.2 R67.2 R70.2 R75.2(B) R76.2(B) RA2.2 RA3.2 RA4.2 RA5.2 RA6.2 RA7.2 RA8.2 U1.3 U1.6 U1.12 U1.16 U1.21 U1.26 U1.35 U1.40 U1.41 U1.47 U1.52 U1.53 U1.58 U1.59 U1.61 U1.63 U1.64 U1.65 U1.66 U1.67 U1.68 U1.69 U1.70 U1.71 U1.72 U1.86 U1.92 U1.93 U1.98 U1.102 U1.103 U1.109 U1.114 U1.119 U1.128 U1.129 U1.134 U1.139 U1.144 U1.146 U1.150 U1.156 U1.159 U2.4 U3.4(GND) U4.4(GND) U5.1(GND) U7.5(GND) U9.3(EMITTER) U10.9(BGGND) U10.10(PLLGND) U10.69(E-PAD GND) U14.3(GND) U28.4(GND)
V5V: C25.1 C27.1(A) C29.1(A) R29.1 R31.1 R35.1 R40.2 U5.4(+VO) U6.8(VCC) U8.8(VCC)
VBAT: U1.100
VIN+: F1.1 J4.2
VIN-: D6.3 J4.1 R6.1(A)
16D_AL_OUT: R98.2(B) U14.6(NO)
485_A: D21.2(C2) J6.1 R43.2(B)
485_B: D21.1(C1) J6.2 R39.2(B)
AC_INL/MIC_IN: U1.10
AC_INR: U1.8
AC_MICBIAS: U1.14
AC_OUTL: R98.1(A) U1.2
AC_OUTR: U1.4
AFT: R66.1 R69.1 U10.40(AUTO_FACTORY_TEST)
ALARM1: C30.2 D22.1(ANODE) J7.2 U9.2(CATHODE)
AU_C: R97.1(A) U14.1(IN)
AU_COM: J18.3 R100.2(B) U14.5(COM)
BF_STM_DIS: R60.1 RA5.1 U10.47(LINK_LED3/SCLK/BF_STM_DIS)
COS_DIS: R61.1 RA7.1 U10.48(LINK_LED2/SDATA/COS_DIS)
DIS_FLOW_CTRL: U1.131
DSI_CKN/LCD_DATA13/LCD1_DATA2: U1.107
DSI_CKP/LCD_DATA12/LCD1_DATA1: U1.105
DSI_D0N/LCD_DATA9/LCD1_VSYNC: U1.117
DSI_D0P/LCD_DATA8/LCD1_DE: U1.115
DSI_D1N/LCD_DATA10/LCD1_HSYNC: U1.113
DSI_D1P/LCD_DATA11/LCD1_DATA0: U1.111
DSI_D2N/LCD_DATA14/LCD1_DATA3: U1.101
DSI_D2P/LCD_DATA15/LCD1_DATA4: U1.99
DSI_D3N/LCD_DATA17/LCD1_CLK: U1.97
DSI_D3P/LCD_DATA16/LCD1_DATA5: U1.95
F_POWER_OFF: R70.1 U10.37(F_POWER_OFF)
FX_DUPLEX6: R63.1 U10.50(LINK_LED0/FX_DUPLEX6)
FX_DUPLEX7: R62.1 U10.49(LINK_LED1/FX_DUPLEX7)
GPIO0_1: R47.2 U1.121
GPIO0_2: U1.123
GPIO3_0: U1.5
GPIO3_1: U1.7
GPIO3_2: U1.9
GPIO3_3: U1.11
GPIO3_4: U1.13
GPIO3_5: U1.15
GPIO3_6: U1.17
GPIO3_7: R2.2 R3.2 U1.19
GPIO5_6: U1.127 U28.5(SDA)
GPIO5_7: U1.125 U28.6(SCL)
GPIO8_0: R2429.1 R2430.2(B) U1.104
GPIO8_1: R2431.1 R2432.2(B) U1.106
GPIO8_2: U1.110
GPIO8_3: U1.112
HDMI_CEC: U1.54
HDMI_HOTPLUG: U1.62
HDMI_SCL: U1.56
HDMI_SDA: U1.60
HDMI_TX0N: U1.51
HDMI_TX0P: U1.49
HDMI_TX1N: U1.45
HDMI_TX1P: U1.43
HDMI_TX2N: U1.39
HDMI_TX2P: U1.37
HDMI_TXCN: U1.57
HDMI_TXCP: U1.55
HI_PRI[0]: R58.1 RA2.1 U10.44(LINK_LED5/HI_PRI[0])
HI_PRI[1]: R57.1 RA3.1 U10.43(LINK_LED6/HI_PRI[1])
HI_PRI[2]: R55.1 RA4.1 U10.42(LINK_LED7/HI_PRI[2])
I2C7_SCL: U1.126
I2C7_SDA: U1.124
IO_IN1: C30.1 D22.2(CATHODE) J7.1 R46.1
JTAG_TDI/SPI1_CSN1: U1.108
LCD_RST: U1.133
LED0: D35.C(CATHODE) R63.2
LED0_ACT: U1.132
LED1: D34.C(CATHODE) R62.2
LED1_LINK: U1.130
LED2: D33.C(CATHODE) R61.2
LED3: D32.C(CATHODE) R60.2
LED4: D31.C(CATHODE) R59.2
LED5: D30.C(CATHODE) R58.2
LED6: D29.C(CATHODE) R57.2
LED7: D28.C(CATHODE) R55.2
LINE_IN-IPC: J10.7 J18.1
LINE_OUT-IPC: J10.8 R99.1(A) R100.1(A)
LSADC_CH0/MUTE: U1.46
LSADC_CH1: R96.1(A) R97.2(B) U1.44
MDC: U10.52(SCL/MDC)
MDI0+: T2.1(TD+) U1.136
MDI0-: T2.3(TD-) U1.138
MDI1+: T2.6(RD+) U1.140
MDI1-: T2.8(RD-) U1.142
MDIO: U10.53(SDA/MDIO)
MIPI_RX0_CK0N/VI_DATA13: U1.23
MIPI_RX0_CK0P/VI_DATA12: U1.25
MIPI_RX0_CK1N/VI_DATA8: U1.33
MIPI_RX0_CK1P/VI_DATA9: U1.31
MIPI_RX0_D0N: U1.27
MIPI_RX0_D0P: U1.29
MIPI_RX0_D1N: U1.36
MIPI_RX0_D1P: U1.38
MIPI_RX0_D2N/VI_DATA15: U1.28
MIPI_RX0_D2P/VI_DATA14: U1.30
MIPI_RX0_D3N/VI_DATA10: U1.32
MIPI_RX0_D3P/VI_DATA11: U1.34
PRX1N: R2437.1 T4.9(RX-)
PRX1P: R2438.1 T4.11(RX+)
PRX2N: R2436.1 T5.9(RX-)
PRX2P: R2435.1 T5.11(RX+)
PRX+1: J12.3 R2438.2
PRX+2: J13.3 R2435.2
PRX+5: J11.1 T1.11(RX+)
PRX-1: J12.4 R2437.2
PRX-2: J13.4 R2436.2
PRX-5: J11.2 T1.9(RX-)
PTX1N: R2439.1 T4.14(TX-)
PTX1P: R2440.1 T4.16(TX+)
PTX2N: R2434.1 T5.14(TX-)
PTX2P: R2433.1 T5.16(TX+)
PTX+1: J12.1 R2440.2
PTX+2: J13.1 R2433.2
PTX+5: J11.3 T1.16(TX+)
PTX-1: J12.2 R2439.2
PTX-2: J13.2 R2434.2
PTX-5: J11.6 T1.14(TX-)
PTX-6: R53.1 R74.2(B) R76.1(A) U10.22(FXSD6)
PTX-7: R52.1 R73.2(B) R75.1(A) U10.34(FXSD7)
PWM0: U1.48
PWM1: U1.50
REG_OUT: C37.1 C38.1 C44.1 C45.1 C46.1 RP1.2 U10.21(AV10#21) U10.55(VREG_LDO) U10.66(AV10#66)
RELAY+1: J8.1 RLY3.4
RELAY+2: J9.1 RLY4.4
RELAY-1: J8.2 RLY3.5
RELAY-2: J9.2 RLY4.5
RESET: C32.2 R64.2 U10.35(RESETB)
RLY_OUT1: Q13.1(B) R2429.2
RLY_OUT2: Q14.1(B) R2431.2
RSVD_GMAC_FILTER: R59.1 RA6.1 U10.46(LINK_LED4/RSVD_GMAC_FILTER)
RX3N: R79.2(B) T2.16(TX+)
RX3P: R80.2(B) T2.14(TX-)
RXD_485: R37.1 U8.1(R0)
RXIM0: U10.58(RXIM0)
RXIM1: T4.8(RD-) U10.64(RXIM1)
RXIM2: T5.8(RD-) U10.68(RXIM2)
RXIM3: R79.1(A) U10.6(RXIM3)
RXIM4: U10.13(RXIM4)
RXIM5: T1.8(RD-) U10.19(RXIM5)
RXIM6: U10.24(RXIM6)
RXIM7: U10.30(RXIM7)
RXIP0: U10.57(RXIP0)
RXIP1: T4.6(RD+) U10.65(RXIP1)
RXIP2: T5.6(RD+) U10.67(RXIP2)
RXIP3: R80.1(A) U10.7(RXIP3)
RXIP4: U10.12(RXIP4)
RXIP5: T1.6(RD+) U10.20(RXIP5)
RXIP6: U10.23(RXIP6)
RXIP7: U10.31(RXIP7)
SD6: R72.2(B) R74.1(A)
SD7: R71.2(B) R73.1(A)
SDIO0_CARD_DETECT: U1.141
SDIO0_CARD_POWER_EN: U1.153
SDIO0_CCLK_OUT: U1.149
SDIO0_CCMD: U1.147
SDIO0_CDATA0: U1.145
SDIO0_CDATA1: U1.151
SDIO0_CDATA2: U1.143
SDIO0_CDATA3: U1.155
SDIO1_CCLK_OUT: U1.87
SDIO1_CCMD: U1.89
SDIO1_CDATA0: U1.85
SDIO1_CDATA1: U1.81
SDIO1_CDATA2: U1.83
SDIO1_CDATA3: U1.91
SENSOR0_CLK: U1.24
SENSOR0_RSTN/BOOT_SEL1: U1.22
SPI0_CSN/I2C1_SCL: U1.120
SPI0_SCLK/I2C0_SCL: U1.116
SPI0_SDI/I2C1_SDA: U1.122
SPI0_SDO/I2C0_SDA: U1.118
TP_INT: U1.135
TP_RST: U1.137
TX3N: R81.2(B) T2.11(RX+)
TX3P: R82.2(B) T2.9(RX-)
TXD_485: R33.2 R44.1 U8.4(DI)
TXOM0: U10.60(TXOM0)
TXOM1: T4.3(TD-) U10.62(TXOM1)
TXOM2: T5.3(TD-) U10.2(TXOM2)
TXOM3: R81.1(A) U10.4(TXOM3)
TXOM4: U10.15(TXOM4)
TXOM5: T1.3(TD-) U10.17(TXOM5)
TXOM6: U10.26(TXOM6)
TXOM7: U10.28(TXOM7)
TXOP0: U10.59(TXOP0)
TXOP1: T4.1(TD+) U10.63(TXOP1)
TXOP2: T5.1(TD+) U10.1(TXOP2)
TXOP3: R82.1(A) U10.5(TXOP3)
TXOP4: U10.14(TXOP4)
TXOP5: T1.1(TD+) U10.18(TXOP5)
TXOP6: U10.25(TXOP6)
TXOP7: U10.29(TXOP7)
UART0_RXD: D1.1 J1.3 U1.82
UART0_TXD: D2.1 J1.1 U1.84
UART1_RXD: R38.2 U1.88
UART1_TXD: R32.1 U1.90
UART4_RXD: U1.96
UART4_TXD: U1.94
UPDATE_MODE: U1.42
USB_DM: U1.154
USB_DP: U1.152
USB_OVRCUR: U1.160
USB_PWREN: U1.158
VGND: C25.2 C27.2(B) C29.2(B) D21.3(A) Q2.2(E) U5.3(0V) U6.5(GND) U8.5(GND)
VI_CLK/VO_CLK: U1.1
VI_HS/SENSOR_HS/SENSOR1_RSTN: U1.20
VI_VS/SENSOR_VS/SENSOR1_CLK: U1.18
VLAN_DIS: R54.1 RA8.1 U10.41(F_POWER_OFF_LED/VLAN_DIS)
WOL: RA1.1 U10.51(WOL)
X1: C31.2 R56.1 U10.32(OSCI) X1.1
X2: C33.2 R56.2 U10.33(X2) X1.2
N17404012: R41.1 R43.1(A) U8.6(A)
N17404016: R39.1(A) R41.2 U8.7(B)
N17404069: Q2.1(B) R44.2
N17404085: Q2.3(C) R40.1 R42.1
N17404113: R42.2 U8.2(R\E\) U8.3(DE)
N17404145: R32.2 U6.3(C)
N17404149: R30.2 U6.2(A)
N17404220: R31.2 U6.7(VE)
N17404226: R29.2 R33.1 U6.6(VO)
N17404271: R37.2 U7.3(C)
N17404275: R35.2 U7.2(A)
N17404327: R36.2 U7.7(VE)
N17404341: R34.2 R38.1 U7.6(VO)
N17405592: Q1.1(B) R2.1
N17405597: Q1.3(C) R1.1
N17405607: J2.2 R1.2
N17405664: D3.1(K) J2.1
N17412153: R67.1 U10.8(BGRES)
N17412700: D27.C(CATHODE) R54.2
N17412952: R65.2 U10.38(TEST1)
N17417309: R45.2 R47.1 U9.4(COLLECTOR)
N17417311: R46.2 U9.1(ANODE)
N17433481: C62.2 T2.2(CTD)
N17433488: C63.2 T2.7(CRD)
N17434052: C68.2 T5.2(CTD)
N17434056: C69.2 T5.7(CRD)
N17434086: R86.1 T5.15(CTX)
N17434090: R85.1 T5.10(CRX)
N17434094: C70.2 R85.2 R86.2
N17434100: C66.2 R83.2 R84.2
N17434102: C64.2 T4.2(CTD)
N17434108: C65.2 T4.7(CRD)
N17434132: R84.1 T4.15(CTX)
N17434136: R83.1 T4.10(CRX)
N17434150: C66.1 C67.2
N17434164: C70.1 C71.2
N17436281: C58.2 R77.2 R78.2
N17436283: C56.2 T1.2(CTD)
N17436287: C57.2 T1.7(CRD)
N17436311: R78.1 T1.15(CTX)
N17436315: R77.1 T1.10(CRX)
N17436327: C58.1 C59.2
N17439494: C5.1(A) R7.2(B)
N17439575: C8.2(B) R11.2(B) R16.2(B) R18.1(A)
N17439589: C13.1(A) R10.1(A) U3.7(VCC)
N17439595: C12.1(A) R8.2(B) U3.6(EN/SYNC)
N17439607: C5.2(B) L1.1(A) U3.3(SW)
N17439613: R16.1(A) U3.8(FB)
N17439635: R10.2(B) R17.1(A) U3.1(AAM)
N17439643: R7.1(A) U3.5(BST)
N17439677: D17.A R9.2
N17440593: C23.1(A) R20.2(B) U4.6(EN/SYNC)
N17440661: R26.1(A) U4.8(FB)
N17440667: R25.2(B) R26.2(B) R28.1(A)
N17440673: R19.1(A) U4.5(BST)
N17440679: R24.2(B) R27.1(A) U4.1(AAM)
N17440691: C24.1(A) R24.1(A) U4.7(VCC)
N17440699: C16.1(A) R19.2(B)
N17440701: C16.2(B) L2.1(A) U4.3(SW)
N17440954: D20.A R21.2
N17442256: D13.1(CATHODE) R12.1 R14.2
N17442262: C14.1(A) D15.3 R12.2
N17442741: D14.1(CATHODE) R13.1 R15.2
N17442747: C15.1(A) D16.3 R13.2
N17443092: D18.1(CATHODE) R22.1 R23.2
N17443098: C19.1(A) D19.3 R22.2
N17466864: D5.2(K) D6.1 R4.1(A)
N17468028: D50.1 D70.1 LB187.1 RLY3.1(1(+))
N17468032: D50.2 D70.2 Q13.2(E) RLY3.12(12(-))
N17468036: D51.2 D71.2 Q14.2(E) RLY4.12(12(-))
N17468040: D51.1 D71.1 LB188.1 RLY4.1(1(+))
N17475095: D72.2(K) D73.1(A)
N17475102: C1.1(A) D7.2(B) D9.2(B) D72.1(A) U2.3
N17480906: R99.2(B) U14.4(NC)
N18156035: R6.2(B) U2.1
N18156037: C1.2(B) C2.2(B) C3.2(B) C4.1(A)
N18156088: R4.2(B) U2.2
N18156107: C2.1(A) D6.2
N18156167: C3.1(A) D7.1(A) D10.2(B)
N18169099: D4.1(A) F1.2
N174253271: D4.2(K) D5.1(A)

Pads without a net: C59 1; C67 1; C71 1; J10 1 2 4 5; J11 4 5 7 8; M1 1; M2 1; M3 1; M4 1; RLY3 3 8 9 10; RLY4 3 8 9 10; T1 4 5 12 13; T2 4 5 10 12 13 15; T4 4 5 12 13; T5 4 5 12 13; U6 1 4; U7 1 4; U28 1 2 3 7

## Via types
v1: diameter 0.508, hole 0.254, TOP to BOTTOM, 406 vias
v2: diameter 0.61, hole 0.305, TOP to BOTTOM, 2 vias
v3: diameter 0.406, hole 0.203, TOP to BOTTOM, 107 vias

## Routing (per net, layer and track width the routed paths; a pad name or vN(x,y) marks a point on that pad's centre or on a via; arc(x,y) is an arc through that point)
3V3_BD: length 34.9
  TOP w0.381: v1(40.8,38.11) 40.8,40.49 39.4,41.89 39.4,44.64 39.4,45.53 40.27,46.41 v1(41.14,46.41)
  TOP w0.508: R71.1 v1(14.61,24.16) ; R72.1 v1(10.58,32.28)
  S1 w0.508: v1(22.99,40.16) 25.79,40.16 26.47,40.84 26.47,43.84 v1(23.9,46.41)
  BOTTOM w0.381: R2430.1 v1(44.89,54.3)
  BOTTOM w0.508: v1(45.45,25.65) 43.5,25.65 42.79,26.37 C207.2 ; LB187.2 v1(33.58,54.8) ; LB188.2 v1(52.8,54.92) ; D3.2 v1(29.96,57.67) ; U7.8 41.14,46.83 v1(41.14,46.41) ; R45.1 v1(46.73,55.83) ; R2432.1 v1(50.98,54.67) ; v1(23.9,46.41) R30.1
  BOTTOM w0.711: 10.65,37.92 LB3.1
  vias: v1(10.41,36.84) v1(10.46,36.21) v1(11.12,36.82) v1(11.07,36.21) v1(11.7,36.21) v1(21.93,39.67) v1(21.95,39.03) v1(22.99,39.53) v1(23,38.96) v1(58.94,3.33) v1(58.93,2.63) v1(59.69,3.34) v1(59.7,2.64)
3V3_CORE:
  vias: v1(5.74,39.38) v1(5.73,38.68) v1(5.73,38.02) v1(6.34,40.03) v1(6.36,39.38) v1(6.35,38.68) v1(6.35,38.02) v1(7.15,40.06) v1(7.91,40.06) v1(8.74,40.06) v1(19.47,39.65) v1(19.47,39) v1(20.06,39.63) v1(20.06,38.98) v1(20.69,39.63) v1(20.69,38.97) v1(21.29,39.64) v1(21.29,38.99)
5V0_BD: length 86.9
  TOP w0.508: v1(8.8,41.46) 8.8,42.38 8.33,42.85 7.76,42.85 D13.2 4.53,41.34 5.03,40.83 v1(8.77,40.83)
  TOP w0.635: v2(55.29,7.13) 55.7,6.72 55.7,5.82 J18.5
  S1 w0.635: v2(55.29,7.13) 55.29,7.14 55.29,8.31 54.66,8.94 24.13,8.94 23.62,9.46 23.62,15.84 v2(24.24,16.47)
  P1 w0.635: v2(24.24,16.47) 22.88,17.83 18.69,17.83 11.43,25.09 11.43,33.95 13,35.51 v1(13.69,35.51) 13.72,35.49 v1(14.42,35.49)
  vias: v1(14.45,36.14) v1(15.07,35.48) v1(15.2,36.14) v1(15.76,35.5) v1(16.79,49.7) v1(17.54,49.7) v1(18.29,49.7) v1(40.11,44.07) v1(40.11,43.41) v1(40.11,42.72) v1(40.11,42.07)
12V0: length 4.6
  TOP w0.508: J18.7 v1(58.17,1.17)
  vias: v1(5.64,24.75) v1(5.64,24.07) v1(5.64,23.39) v1(6.29,24.76) v1(6.29,24.08) v1(6.29,23.4) v1(15.32,45.9) v1(16,48.61) v1(15.98,47.92) v1(16.01,47.26) v1(16.01,46.6) v1(16,45.97) v1(16.07,69.1) v1(16.07,68.41) v1(16.07,67.71) v1(16.78,69.11) v1(16.78,68.41) v1(16.78,67.72) v1(17.49,69.11) v1(17.49,68.41) v1(17.49,67.72) v1(19.14,43.19) v1(19.12,42.56) v1(19.17,43.79) v1(19.83,43.23) v1(19.88,43.82) v1(27.85,4.48) v1(27.85,3.65) v1(27.85,2.81) v1(27.85,1.97) v1(28.67,4.48) v1(28.67,3.65) v1(28.67,2.81) v1(28.67,1.97) v1(29.04,44.41) v1(28.98,43.04) v1(28.97,41.52) v1(28.98,40.26) v1(29.74,44.41) v1(29.68,43.04) v1(29.67,41.52) v1(29.68,40.26)
12V_IPC: length 5.9
  TOP w0.203: J11.10 v1(23.67,2.78)
  BOTTOM w0.203: D36.2 23.36,2.78 v1(23.67,2.78)
AV10: length 3.9
  TOP w0.254: v1(27.49,26.81) 27.49,26.87 27.1,27.27 U10.54 ; v1(19.65,24.89) 19.84,25.07 U10.36
  BOTTOM w0.254: v1(19.65,24.89) 19.83,25.06 C42.1 ; C43.1 v1(27.49,26.81)
  vias: v1(31.73,27.76) v1(32.3,27.76) v1(32.88,27.76) v1(33.46,27.76)
AVCC: length 12.9
  TOP w0.254: U10.3 25.04,34.43 25.11,34.51 v1(25.11,35.02) ; U10.16 v1(19.84,34.43) ; v1(27.48,28.72) 27.48,28.43 27.12,28.07 U10.56 ; RA1.2 v1(26.66,22.87) ; U10.61 v1(27.45,30.07) ; U10.27 v1(17.84,29.27) ; v1(21.82,34.37) 21.82,33.69 U10.11
  BOTTOM w0.254: C51.1 18.69,29.27 v1(17.84,29.27) ; C48.1 19.84,33.58 v1(19.84,34.43) ; v1(27.45,30.07) 26.59,30.07 C50.1 ; v1(25.11,35.02) 25.11,33.87 C49.1 ; C47.1 v1(21.82,34.37) ; C52.1 v1(27.48,28.72)
  vias: v1(19.8,36.65) v1(20.33,37.1) v1(20.37,36.24) v1(20.96,37.43) v1(20.96,36.74) v1(20.97,35.98)
DVCC: length 25.1
  TOP w0.254: D33.A v1(57.88,11.82) ; U10.39 21.03,24.94 21.08,24.89 v1(21,24.89) ; U10.45 23.44,25.02 23.48,24.97 v1(23.48,24.89) ; R64.1 20.11,22.18 v1(20.08,22.18) ; D28.A v1(49.3,11.82) ; D32.A v1(56.14,11.82) ; D30.A v1(52.7,11.82) ; D35.A v1(61.37,11.82) ; D34.A v1(59.64,11.82) ; D29.A v1(50.96,11.82) ; D31.A v1(54.46,11.82) ; v1(23.88,23.75) 23.9,23.75 23.9,23.77 R69.2 ; D27.A v1(47.62,11.82)
  BOTTOM w0.254: v1(23.48,24.89) 23.48,24.97 23.45,25.01 C39.1 ; v1(21,24.89) 21.08,24.89 21.08,25.75 C40.1
  vias: v1(27.82,37.84) v1(28.5,37.84) v1(29.17,37.84) v1(29.85,37.84) v1(30.53,37.84) v1(31.2,37.84)
GND: length 268.2
  TOP w0.127: v3(21.97,19.85) 21.97,19.96 RA3.2 ; v3(19.81,19.85) 19.81,19.96 RA8.2 ; v1(23.02,32.89) 22.64,33.28 U10.9 ; R76.2 v1(13.16,34.07) ; RA4.2 20.88,19.96 v3(20.88,19.85) ; C56.1 v3(13,16.06) ; RA6.2 v3(24.14,19.85) ; v3(23.04,19.85) 23.04,19.96 RA2.2 ; RA7.2 v3(26.36,19.85) ; v1(22.36,32.93) 22.23,33.05 U10.10 ; RA5.2 v3(25.24,19.85) ; C57.1 v3(19.34,16.05)
  TOP w0.203: U1.146 v1(40.79,35.35) ; U1.12 v1(5.46,19.15) ; U1.109 v1(45.36,24.55) ; 11.69,42.37 v1(10.73,41.41) ; U1.114 40.81,25.75 v1(41.69,24.86) ; v1(1.71,35.98) 1.71,35.98 1.74,35.95 U1.68 ; U1.119 v1(45.32,27.55) ; R14.1 14.66,46.38 v1(14.66,45.9) ; U1.40 v1(1.87,27.55) ; v1(32.45,19.68) 32.45,17.81 33.35,16.9 C63.1 ; v1(6.51,37.15) U1.71 ; U1.98 v1(41.92,20.95) ; J11.9 v1(22.42,1.96) ; v1(53.71,7.04) 53.71,5.97 53.89,5.8 J18.4 ; R65.1 21.4,22.71 21.4,22.17 v3(21.45,22.12) ; U1.134 v1(37.45,31.75) ; U1.103 v1(41.93,22.75) ; U1.47 v1(9.77,29.94) ; J10.3 v1(35.53,3.65) ; U1.16 v1(5.47,20.35) ; U1.144 40.77,34.75 40.81,34.71 v1(40.81,34.71) ; v1(6.51,35.95) U1.67 ; v1(1.72,35.38) 1.75,35.35 U1.66 ; C15.2 27.82,47.74 v1(27.82,48.16) ; U1.41 v1(9.77,28.15) ; C13.2 v1(24.79,46.42) ; U1.93 v1(45.33,19.75) ; U1.128 v1(37.41,29.94) ; R66.2 v3(23.84,22.7) ; U1.6 v1(5.47,17.34) ; U1.59 v1(6.51,33.55) ; v1(6.1,34.15) U1.61 ; U1.53 7.02,31.75 v1(6.36,32.4) ; C31.1 16.15,31.37 15.91,31.61 10.59,31.61 10.4,31.42 v3(10.4,28.39) 10.4,25.44 10.42,25.41 10.42,25.19 10.56,25.06 13.28,25.06 13.92,25.7 15.94,25.7 16.14,25.91 C33.1 ; U1.58 v1(1.74,32.95) ; U1.26 v1(1.92,23.35) ; J10.6 v1(39.28,3.61) ; v1(6.51,34.82) 6.51,34.75 U1.63 ; v1(1.69,36.61) 1.76,36.55 U1.70 ; v1(60.11,6.98) 60.05,6.98 59.42,6.35 J18.8 ; J18.6 v1(56.92,7.03) ; U1.72 v1(1.68,37.15) ; v1(41.63,33.22) 41.96,33.55 U1.139 ; v1(36.92,17.79) 37.36,17.34 U1.86 ; U1.52 v1(1.79,31.14) ; U1.129 v1(45.28,30.54) ; U1.156 v1(37.39,38.35) ; R67.2 v3(22.04,37.13) ; J18.2 v1(51.92,7.03) ; U1.35 v1(9.78,26.35) ; v1(6.1,36.55) U1.69 ; U1.64 v1(1.72,34.75) ; C62.1 v1(27.02,15.97) ; U1.102 v1(41.36,22.15) ; v1(36.88,18.67) 37.35,19.15 U1.92 ; v1(27.9,49.72) 27.9,49.59 R15.1 ; U1.150 v1(37.37,36.55) ; v1(41.87,36.84) 41.66,36.84 41.45,37.04 41.45,39.34 41.66,39.55 U1.159 ; U1.3 v1(6.26,16.74) ; v1(6.1,35.35) U1.65
  TOP w0.254: C14.2 15.21,44.03 C6.2 17.16,44.03 C7.2 17.45,44.3 17.6,44.44 v1(17.6,45.52) ; U3.4 19.87,40.32 19.5,40.32 19.5,40.29 v1(19.5,40.29) ; D16.1 24.37,44.88 24.23,45.02 C13.2 23.28,45.14 R17.2 22.26,45.72 22.01,45.98 20.99,45.98 v1(20.63,45.62) 20.13,45.62 19.9,45.39 C12.2 ; v1(10.14,41.06) 10.14,40.16 R18.2 ; C11.2 12.11,42.85 C9.2 11.69,41.57 11.66,41.54 C10.2 10.71,40.88 10.71,40.78 v1(10.71,40.78)
  TOP w0.381: D17.C v1(9.4,43.22) ; U1.21 v1(6.22,22.15) ; R75.2 v1(15.57,24.1) ; v1(19.04,22.34) 19.04,22.68 19.02,22.7 C32.1 ; C11.2 v1(11.32,43.69)
  TOP w0.508: D16.1 25.87,44.26 v1(27.15,42.97) ; C4.2 v3(27.65,53.1) ; U2.4 16.04,53.79 v1(16.88,52.95)
  S1 w0.203: v1(20.63,45.62) 20.15,45.62 20.06,45.52 v1(17.6,45.52)
  S1 w0.508: v1(53.02,49.84) 51.01,51.84 v1(49.04,51.84)
  BOTTOM w0.203: R23.1 5.31,45.85 4.71,45.25 4.71,43.4 5.49,42.62 v1(5.86,42.62) ; v1(13.05,49.46) 13.05,49.7 12.77,49.97 10.8,49.97 9.95,49.12 C24.2 10.48,48.47 10.59,48.58 R27.2 11.08,49.07 11.5,49.49 v1(12.39,49.49) ; U4.4 11.99,44.35 v1(11.32,43.69) ; 56.26,43 J1.2 ; C18.2 v1(15.26,49.59) ; v1(6.52,42.6) 6.52,42.9 5.57,43.86 C19.2 ; v1(13.78,49.65) 13.78,49.51 13.07,48.8 C23.2
  BOTTOM w0.254: C17.2 17.03,48.49 16.1,49.41 v1(16.1,49.71) ; v1(16.69,36.1) 16.13,36.1 15.83,36.4 C54.2 ; R28.2 22.2,43.81 22.89,43.81 v1(25.18,41.52) ; v1(25.77,42.08) 25.41,42.43 24.94,42.43 22.29,45.09 C20.2 21.16,45.09 v1(20.63,45.62) ; v1(17.73,33.28) 17.94,33.5 C55.2
  BOTTOM w0.381: C36.2 31.29,34.99 C35.2 ; D2.2 v1(55.44,44.8) ; R52.2 v1(16.48,23.3) ; v3(51.43,37.58) C68.1 ; C26.2 v1(38.82,40.45) ; v1(41.28,53.67) 41.29,53.67 41.29,52.52 41.89,51.92 U7.5 ; U9.3 v1(50.16,56.46) ; v3(28.4,28.65) C37.2 ; R3.1 v1(28.94,61.54) ; v1(19.04,22.34) 19.67,22.97 R70.2 ; R53.2 v1(12.34,33.38) ; C35.2 v1(30.95,34.54) ; C35.2 v1(30.16,35.33) ; D1.2 v1(56.65,44.74) ; U14.3 v1(55.24,3.33) ; v1(56.22,2.17) 56.23,2.16 C78.1 ; C69.1 v3(51.4,31.19) ; C207.1 v1(45.36,26.6) ; Q1.2 v1(30.2,62.01) ; C41.2 v3(33.03,30.25) ; Q14.3 v1(49.04,51.84) ; U28.4 36.99,30.41 v1(37.34,30.76) ; C65.1 v3(51.15,15.49) ; v1(48.7,42.09) 48.58,42.09 47.51,43.17 C28.2 ; C64.1 v3(51.2,21.88) ; Q13.3 v1(43.03,58.57) ; D10.1 v1(22.11,59.08) ; C34.2 v3(28.7,35.34) ; v3(12.38,36.11) 13.4,36.11 C53.2 ; C38.2 v3(30.64,27.93)
  BOTTOM w0.508: D15.1 v1(27.92,39.09) ; v1(23.13,50.42) 23.13,48.49 22.23,47.59 D20.C ; D20.C 22.18,46.52 21.96,46.3 C20.2 21.96,45.08 R28.2 ; D20.C 21.76,47.17 C21.2 20.16,47.52 C22.2 ; v1(5.69,35.97) 4.99,36.68 D19.1 ; D9.1 25.85,52.24 v1(25.02,51.41)
  vias: v1(10.29,35.55) v1(10.31,34.04) v1(14.61,34.12) v1(14.85,2.85) v1(15.49,34.12) v1(15.64,2.86) v1(18.55,1.04) v1(19.54,30.35) v1(19.83,27.82) v1(19.91,30.82) v1(20.36,1.08) v1(20.47,32.88) v1(21.1,32.89) v1(21.09,31.06) v1(21.09,30.31) v1(21.06,27.97) v1(21.29,9.69) v1(21.32,8.98) v1(21.85,31.06) v1(21.85,30.31) v1(21.86,27.93) v1(22.61,31.06) v1(22.61,30.31) v1(22.62,27.95) v1(23.28,68.3) v1(23.37,31.06) v1(23.37,30.31) v1(23.39,0.93) v1(23.48,27.92) v1(23.74,32.88) v1(24.14,31.06) v1(24.14,30.31) v1(24.3,27.92) v1(25.03,35.67) v1(25.04,30.95) v1(25.71,31.04) v1(25.82,68.3) v1(26.03,18.95) v1(26.01,6.83) v1(28.01,6.86) v1(28.36,68.3) v1(28.47,0.93) v1(30.76,18.74) v1(30.9,68.3) v1(32.24,6.92) v1(33.44,68.3) v1(33.55,0.93) v1(34.43,6.93) v1(35.52,18.14) v1(35.52,17.49) v1(35.98,68.3) v1(36.09,0.93) v1(36.97,11.47) v1(38.52,68.3) v1(38.63,0.93) v1(38.68,11.43) v1(41.17,0.93) v1(45.95,33.2) v1(46.25,0.93) v1(46.65,33.21) v1(47.27,34.94) v1(47.69,20.9) v1(47.73,16.59) v1(47.71,14.05) v1(47.77,22.94) v1(48.5,32.35) v1(51.33,0.93) v1(53.87,0.93) v1(68.65,42.48) v1(68.65,39.94) v1(68.65,37.4) v1(68.65,34.86) v1(68.65,32.32) v1(68.65,29.78) v1(68.65,27.24) v1(68.65,24.7) v1(68.65,22.16) v1(68.65,19.62) v1(68.65,17.08) v1(68.65,14.54) v1(68.65,12) v1(68.65,9.46) v3(36.98,34.47) v3(37.1,35.54)
V5V: length 7.2
  TOP w0.508: R40.2 v1(33.98,47.01) ; C29.1 44.91,46.63 v1(45.77,46.63) ; U8.8 v1(41.86,52.76)
  BOTTOM w0.508: v1(46.63,39.99) 46.63,39.63 46.19,39.2 C27.1 ; R35.1 34.47,52.99 v1(34.21,52.73)
  vias: v1(32.41,46.29) v1(32.85,47.07) v1(33.06,46.29) v1(33.42,47.06) v1(33.75,46.3)
VIN-:
  vias: v1(1.73,50.8) v1(1.73,49.93) v1(1.73,49.07) v1(1.73,48.21) v1(2.64,50.8) v1(2.64,49.93) v1(2.64,49.07) v1(2.64,48.21)
16D_AL_OUT: length 1.3
  BOTTOM w0.203: U14.6 52.06,5.4 R98.2
485_A: length 10
  TOP w0.152: D21.2 48.29,48.82 ; 48.29,48.82 48.45,48.97 48.72,48.97 50.64,47.05 50.64,44.83 50.39,44.59 49.74,44.59 J6.1 ; 48.29,48.82 48.14,48.97 47.43,48.97 R43.2
485_B: length 11
  TOP w0.152: 48.29,49.43 48.14,49.28 47.35,49.28 R39.2 ; 48.29,49.43 48.45,49.28 48.85,49.28 50.94,47.18 50.94,44.71 50.52,44.29 49.74,44.29 J6.2 ; 48.29,49.43 D21.1
AC_OUTL: length 56.5
  TOP w0.203: v1(1.34,16.15) 1.82,16.15 1.83,16.15 U1.2
  S1 w0.203: v1(1.34,16.15) 12.33,5.15 v1(49.5,5.15)
  BOTTOM w0.203: R98.1 v1(49.5,5.15)
AFT: length 3.3
  TOP w0.127: U10.40 21.44,25.16 21.45,25.15 21.44,25.15 21.44,24.56 R69.1 22.23,23.15 22.23,23.14 R66.1
ALARM1: length 22.8
  BOTTOM w0.381: U9.2 56.22,56.46 D22.1 57.18,55.45 C30.2 59.59,53.04 66.99,53.04 67.25,53.3 67.25,58.37 67.13,58.5 J7.2
AU_C: length 1.7
  BOTTOM w0.203: R97.1 56.2,5.11 55.91,5.4 U14.1
AU_COM: length 8.7
  TOP w0.203: J18.3 53.17,4.72 v1(54.26,3.62)
  BOTTOM w0.203: 53.31,4.75 U14.5 ; 53.31,4.75 53.71,4.75 53.72,4.74 53.83,4.74 54.26,4.3 v1(54.26,3.62) ; 53.31,4.75 53.75,4.3 53.75,3.1 53.33,2.68 R100.2
BF_STM_DIS: length 42.6
  TOP w0.127: RA5.1 v3(25.24,22.02) ; U10.47 24.24,25.08 24.33,24.98 24.33,24.88 v3(24.33,24.88)
  BOTTOM w0.127: R60.1 54.65,10.77 47.03,10.77 40.34,17.45 40.34,20.39 39.12,21.61 25.65,21.61 v3(25.24,22.02) 24.33,22.93 v3(24.33,24.88)
COS_DIS: length 43.5
  TOP w0.127: U10.48 24.63,25.28 24.83,25.09 v3(24.83,24.39) ; RA7.1 v3(26.36,22.03)
  BOTTOM w0.127: v3(24.83,24.39) 24.83,23.56 v3(26.36,22.03) 39.07,22.03 40.82,20.27 40.82,17.49 47.3,11.02 56.2,11.02 R61.1
F_POWER_OFF: length 2.1
  TOP w0.127: U10.37 20.23,25.08 20.24,25.07 20.24,24.61 v3(20.17,24.61)
  BOTTOM w0.127: R70.1 20.09,24.38 20.24,24.54 20.24,24.61 v3(20.17,24.61)
FX_DUPLEX6: length 44.6
  TOP w0.127: v3(25.78,24.84) 25.78,24.96 25.43,25.3 U10.50
  BOTTOM w0.127: v3(25.78,24.84) 25.78,24.41 27.29,22.9 39.18,22.9 41.57,20.51 41.57,18.09 47.36,12.29 58.4,12.29 R63.1
FX_DUPLEX7: length 44.1
  TOP w0.127: U10.49 25.08,25.62 25.08,24.99 v3(25.23,24.84)
  BOTTOM w0.127: v3(25.23,24.84) 25.23,23.67 26.48,22.42 39.3,22.42 41.08,20.64 41.08,17.64 47.44,11.28 57.72,11.28 R62.1
GPIO0_1: length 33.1
  TOP w0.203: U1.121 45.33,28.15 45.33,28.14 v1(45.82,28.14)
  S1 w0.203: v1(45.82,28.14) 47.88,30.2 47.88,38.53 47.36,39.04 v1(47.36,53.86)
  BOTTOM w0.127: R47.2 45.66,54.44 46.23,53.86 v1(47.36,53.86)
GPIO3_7: length 62.2
  TOP w0.203: U1.19 6.21,21.55 6.18,21.57 v1(5.7,21.57)
  S1 w0.203: v1(5.7,21.57) 4.95,22.32 4.95,51.28 7.78,54.11 7.83,54.11 8.12,54.39 8.12,54.44 11.6,57.92 24.48,57.92 v1(28.12,61.56)
  BOTTOM w0.203: R2.2 28.12,59.78 28.12,59.79 R3.2 v1(28.12,61.56)
GPIO5_6: length 4
  TOP w0.203: v1(41.53,31.23) 41.53,30.27 41.85,29.94 U1.127
  BOTTOM w0.203: U28.5 v1(41.53,31.23)
GPIO5_7: length 6.3
  TOP w0.203: v1(45.72,29.34) 45.24,29.34 45.23,29.35 U1.125
  BOTTOM w0.203: U28.6 45.04,29.14 45.24,29.34 v1(45.72,29.34)
GPIO8_0: length 37
  TOP w0.203: v1(41.01,22.75) 40.91,22.75 40.91,22.75 U1.104
  S1 w0.203: v1(41.01,22.75) 40,23.75 40,36.35 42.04,38.38 42.04,45.49 42.42,45.87 42.42,54.16 v1(42.28,54.3)
  BOTTOM w0.203: R2429.1 43.23,54.79 43.23,54.79 R2430.2 v1(42.28,54.3)
GPIO8_1: length 41.1
  TOP w0.203: v1(41.66,23.35) 41.16,23.35 41.16,23.35 U1.106
  S1 w0.203: v1(41.66,23.35) 44.73,26.41 44.73,51.99 47.34,54.61 v1(50.17,54.61)
  BOTTOM w0.203: R2431.1 50.17,53.04 50.17,53.04 R2432.2 v1(50.17,54.61)
HI_PRI[0]: length 41.9
  TOP w0.127: v3(23.02,22.02) 23.04,22 RA2.1 ; U10.44 v3(23.04,24.44)
  BOTTOM w0.127: v3(23.04,24.44) 23.04,22.04 v3(23.02,22.02) 23.98,21.06 38.2,21.06 39.26,19.99 39.26,15.53 44.55,10.25 51.67,10.25 R58.1
HI_PRI[1]: length 41.4
  TOP w0.127: U10.43 v3(22.64,24.84) ; RA3.1 21.97,22.02 v3(21.98,22.02)
  BOTTOM w0.127: R57.1 50.21,9.98 44.18,9.98 38.67,15.49 38.67,19.8 37.66,20.81 23.19,20.81 v3(21.98,22.02) 21.98,22.42 21.97,22.42 21.97,23.39 22.64,24.06 v3(22.64,24.84)
HI_PRI[2]: length 40.8
  TOP w0.127: v3(20.92,22.08) 20.95,22.08 20.95,21.96 20.88,21.89 RA4.1 ; U10.42 v3(22.23,24.36)
  BOTTOM w0.127: v3(22.23,24.36) 20.92,23.05 v3(20.92,22.08) 20.94,22.08 22.47,20.55 36.86,20.55 37.98,19.44 37.98,15.61 43.85,9.74 44.06,9.74 44.07,9.73 48.86,9.73 R55.1
IO_IN1: length 13.2
  BOTTOM w0.381: R46.1 61.12,60.11 61.25,59.98 D22.2 61.25,55.17 60.8,54.73 C30.1 65.33,54.52 J7.1
LED0: length 2.1
  TOP w0.254: D35.C v3(61.37,7.33)
  BOTTOM w0.254: v3(61.37,7.33) 61.37,8.07 61.34,8.09 R63.2
LED1: length 2.1
  TOP w0.254: D34.C v3(59.64,7.33)
  BOTTOM w0.254: R62.2 59.61,8.12 59.64,8.1 v3(59.64,7.33)
LED2: length 2
  TOP w0.254: D33.C v3(57.88,7.33)
  BOTTOM w0.254: v3(57.88,7.33) R61.2
LED3: length 2
  TOP w0.254: D32.C v3(56.14,7.33)
  BOTTOM w0.254: R60.2 56.11,8.05 56.14,8.02 v3(56.14,7.33)
LED4: length 2.1
  TOP w0.254: D31.C v3(54.46,7.33)
  BOTTOM w0.254: v3(54.46,7.33) 54.46,8.06 54.48,8.08 R59.2
LED5: length 1.9
  TOP w0.254: D30.C v3(52.7,7.33)
  BOTTOM w0.254: R58.2 52.69,7.97 52.7,7.96 v3(52.7,7.33)
LED6: length 1.9
  TOP w0.254: D29.C v3(50.96,7.33)
  BOTTOM w0.254: v3(50.96,7.33) 50.96,7.97 50.96,7.98 R57.2
LED7: length 2
  TOP w0.254: D28.C v3(49.3,7.33)
  BOTTOM w0.254: R55.2 49.27,8.05 49.3,8.02 v3(49.3,7.33)
LINE_IN-IPC: length 11
  TOP w0.203: J10.7 40.53,5.53 41.26,6.25 49.68,6.25 50.14,5.8 J18.1
LINE_OUT-IPC: length 11.7
  TOP w0.203: v1(41.75,3.93) 41.75,5.1 J10.8
  BOTTOM w0.203: v1(41.75,3.93) R99.1 R100.1
LSADC_CH1: length 81.6
  TOP w0.203: U1.44 1.76,28.75 1.75,28.75 v1(1.26,28.75)
  S1 w0.203: v1(1.26,28.75) 1.26,18.2 13.83,5.64 59.8,5.64 v1(60.32,5.11)
  BOTTOM w0.203: R96.1 58.59,4.05 58.13,4.52 58.11,4.52 57.61,5.02 R97.2 v1(60.32,5.11)
